# Altium PCB LiPoKiller_Panel.PcbDoc
Units mm, origin at the board's own origin, x right, y up, seen from the top; angles counter-clockwise.
Board outline 189 x 32 mm, 2 copper layers (Top Layer, Bottom Layer), stack 1.621 mm thick; 38 components, 11 nets, 102 pads, 0 vias.
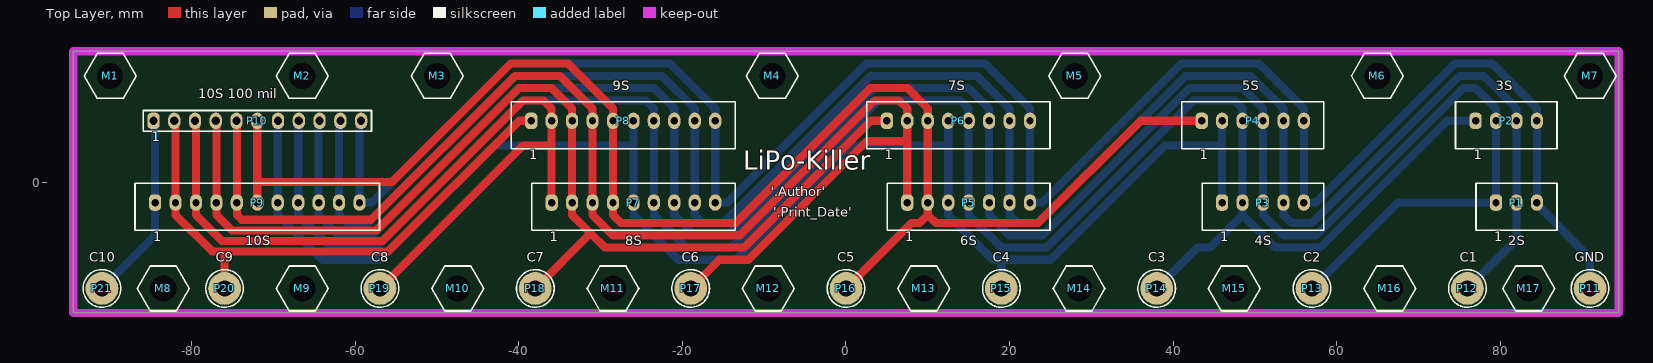
[diagram p0: Top Layer view]
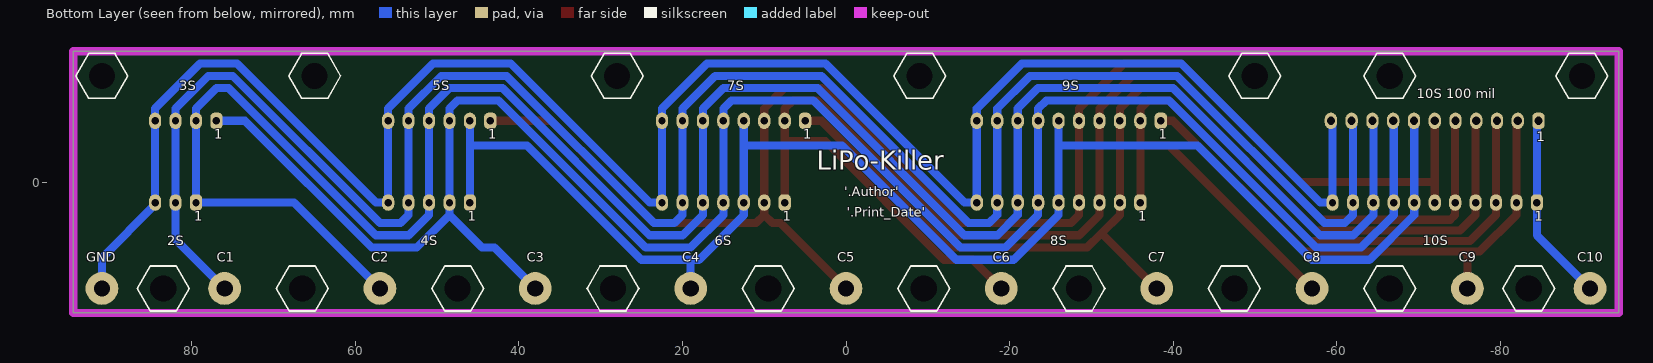
[diagram p1: Bottom Layer view, seen from below]
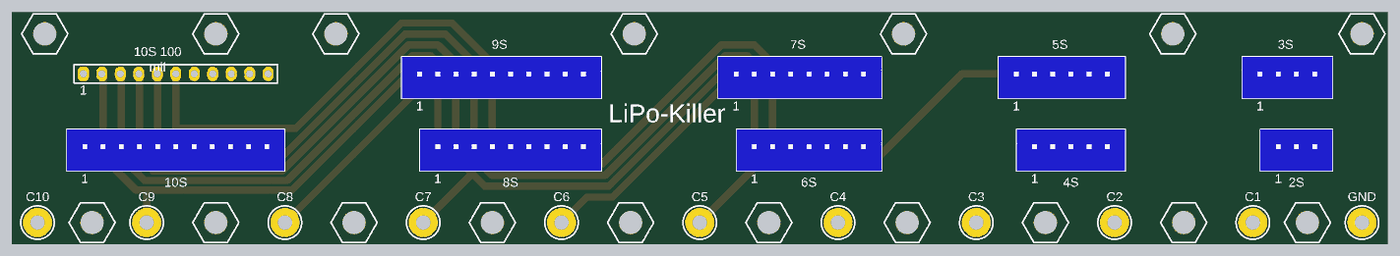
[diagram p2: 3D render of the assembled board from above, using the file's embedded part models]

## Layer stack, top to bottom
Top Solder: solder mask 0.0102, Solder Resist, Dk 3.5
Top Layer: signal copper 0.0356
Dielectric 1: dielectric 1.55, FR-4, Dk 4.8
Bottom Layer: signal copper 0.0356
Bottom Solder: solder mask 0.0102, Solder Resist, Dk 3.5

## Board outline
-94.5,-16 94.5,-16 94.5,16 -94.5,16

## Design rules (kind name [scope] priority, off if disabled: settings)
Clearance [All] p1: gap=0.2 ignorepadtopadclearanceinfootprint=FALSE except(0: Arc-Hole Track-Hole SMDPad-Hole THPad-Hole Via-Hole Fill-Hole Poly-Hole Region-Hole Text-Hole; 0.5: Track-THPad)
HoleSize [All] p1: absolutevalues=TRUE maxlimit=3.2 minlimit=0.3 maxpercent=80.000 minpercent=20.000
PolygonConnect [All] p1: connectstyle=Relief reliefconductorwidth=0.254 reliefentries=4 polygonreliefangle="90 Angle" airgapwidth=0.254
RoomDefinition LiPoKiller_Panel [InComponentClass('LiPoKiller_Panel')] p1: confinementstyle=ConfineIn formatcopy=TRUE lockcomponents=FALSE outline -94.5,-16.5 94.5,-16.5 94.5,16.5 -94.5,16.5
RoutingVias [All] p1: holewidth=0.711 width=1.27 viastyle="Through Hole" minholewidth=0.711 minwidth=1.27 maxholewidth=0.711 maxwidth=1.27
SilkToSolderMaskClearance [IsPad] p1: minsilkscreentomaskgap=0.1 clearancetoexposedcopper=TRUE
SolderMaskExpansion [All] p1: expansion=0.05 istentingtop=FALSE
Width [All] p1: maxlimit=5 minlimit=0.254 preferedwidth=1 minimp=50.000000 maximp=50.000000 favimp=50.000000
28 further rules are at their usual default settings.

## Components (designator, comment, footprint, x,y, rotation, side; value= is the part's Value field where it differs from the comment)
M1 "MOUNT M3" MOUNT_M3 -90,13 r180 top
M2 "MOUNT M3" MOUNT_M3 -66.5,13 r180 top
M3 "MOUNT M3" MOUNT_M3 -50,13 r180 top
M4 "MOUNT M3" MOUNT_M3 -9,13 r180 top
M5 "MOUNT M3" MOUNT_M3 28,13 r180 top
M6 "MOUNT M3" MOUNT_M3 65,13 r180 top
M7 "MOUNT M3" MOUNT_M3 91,13 r180 top
M8 "MOUNT M3" MOUNT_M3 -83.5,-13 r180 top
M9 "MOUNT M3" MOUNT_M3 -66.5,-13 r180 top
M10 "MOUNT M3" MOUNT_M3 -47.5,-13 r180 top
M11 "MOUNT M3" MOUNT_M3 -28.5,-13 r180 top
M12 "MOUNT M3" MOUNT_M3 -9.5,-13 r180 top
M13 "MOUNT M3" MOUNT_M3 9.5,-13 r180 top
M14 "MOUNT M3" MOUNT_M3 28.5,-13 r180 top
M15 "MOUNT M3" MOUNT_M3 47.5,-13 r180 top
M16 "MOUNT M3" MOUNT_M3 66.5,-13 r180 top
M17 "MOUNT M3" MOUNT_M3 83.5,-13 r180 top
P1 "JST_XH_B3B-XH-A" CON_JST_XH_B3B-XH-A 79.5,-2.5 r0 top
P2 "JST_XH_B4B-XH-A" CON_JST_XH_B4B-XH-A 77,7.5 r0 top
P3 "JST_XH_B5B-XH-A" CON_JST_XH_B5B-XH-A 46,-2.5 r0 top
P4 "JST_XH_B6B-XH-A" CON_JST_XH_B6B-XH-A 43.5,7.5 r0 top
P5 "JST_XH_B7B-XH-A" CON_JST_XH_B7B-XH-A 7.5,-2.5 r0 top
P6 "JST_XH_B8B-XH-A" CON_JST_XH_B8B-XH-A 5,7.5 r0 top
P7 "JST_XH_B9B-XH-A" CON_JST_XH_B9B-XH-A -36,-2.5 r0 top
P8 "JST_XH_B10B-XH-A" CON_JST_XH_B10B-XH-A -38.5,7.5 r0 top
P9 "JST_XH_B11B-XH-A" CON_JST_XH_B11B-XH-A -84.5,-2.5 r0 top
P10 "HEAD_2.54_11" CON_HEAD_2.54_11 -84.7,7.5 r0 top
P11 "Con_1" CON_1_2MM_4MM 91,-13 r180 top
P12 "Con_1" CON_1_2MM_4MM 76,-13 r180 top
P13 "Con_1" CON_1_2MM_4MM 57,-13 r180 top
P14 "Con_1" CON_1_2MM_4MM 38,-13 r180 top
P15 "Con_1" CON_1_2MM_4MM 19,-13 r180 top
P16 "Con_1" CON_1_2MM_4MM 0,-13 r180 top
P17 "Con_1" CON_1_2MM_4MM -19,-13 r180 top
P18 "Con_1" CON_1_2MM_4MM -38,-13 r180 top
P19 "Con_1" CON_1_2MM_4MM -57,-13 r180 top
P20 "Con_1" CON_1_2MM_4MM -76,-13 r180 top
P21 "Con_1" CON_1_2MM_4MM -91,-13 r180 top

## Footprints (in the part's own frame and the unit in brackets; to place one, negate y for a bottom-side part, rotate by r counter-clockwise, add the part's x,y. Pads: shape width x height; smd on the part's side, far side on the other; paste and mask are expansions set on the pad)
CON_1_2MM_4MM [mm] "1 Pin, 2mm Drill, 4mm Pad"
  round 4 hole 2: 1(0,0)
  silkscreen extent -2.3,-2.3 2.3,2.3
CON_HEAD_2.54_11 [mm] "Pin header 2.54mm grid, 11 pins"
  rrect70% 1.5x2 hole 1: 1(0,0)
  rrect100% 1.5x2 hole 1: 2(2.54,0) 3(5.08,0) 4(7.62,0) 5(10.16,0) 6(12.7,0) 7(15.24,0) 8(17.78,0) 9(20.32,0) 10(22.86,0) 11(25.4,0)
  silkscreen extent -1.27,-1.27 26.67,1.27, body extent -1.27,-1.27 26.67,1.27, height 10
CON_JST_XH_B3B-XH-A [mm] "JST XH 3 Pin"
  rrect70% 1.5x2 hole 0.9: 1(0,0)
  rrect100% 1.5x2 hole 0.9: 2(2.5,0) 3(5,0)
  silkscreen extent -2.45,-3.4 7.45,2.35, body extent -2.45,-3.4 7.45,2.35, height 7
CON_JST_XH_B4B-XH-A [mm] "JST XH 4 Pin"
  rrect70% 1.5x2 hole 0.9: 1(0,0)
  rrect100% 1.5x2 hole 0.9: 2(2.5,0) 3(5,0) 4(7.5,0)
  silkscreen extent -2.45,-3.4 9.95,2.35, body extent -2.45,-3.4 9.95,2.35, height 7
CON_JST_XH_B5B-XH-A [mm] "JST XH 5 Pin"
  rrect70% 1.5x2 hole 0.9: 1(0,0)
  rrect100% 1.5x2 hole 0.9: 2(2.5,0) 3(5,0) 4(7.5,0) 5(10,0)
  silkscreen extent -2.45,-3.4 12.45,2.35, body extent -2.45,-3.4 12.45,2.35, height 7
CON_JST_XH_B6B-XH-A [mm] "JST XH 6 Pin"
  rrect70% 1.5x2 hole 0.9: 1(0,0)
  rrect100% 1.5x2 hole 0.9: 2(2.5,0) 3(5,0) 4(7.5,0) 5(10,0) 6(12.5,0)
  silkscreen extent -2.45,-3.4 14.95,2.35, body extent -2.45,-3.4 14.95,2.35, height 7
CON_JST_XH_B7B-XH-A [mm] "JST XH 7 Pin"
  rrect70% 1.5x2 hole 0.9: 1(0,0)
  rrect100% 1.5x2 hole 0.9: 2(2.5,0) 3(5,0) 4(7.5,0) 5(10,0) 6(12.5,0) 7(15,0)
  silkscreen extent -2.45,-3.4 17.45,2.35, body extent -2.45,-3.4 17.45,2.35, height 7
CON_JST_XH_B8B-XH-A [mm] "JST XH 8 Pin"
  rrect70% 1.5x2 hole 0.9: 1(0,0)
  rrect100% 1.5x2 hole 0.9: 2(2.5,0) 3(5,0) 4(7.5,0) 5(10,0) 6(12.5,0) 7(15,0) 8(17.5,0)
  silkscreen extent -2.45,-3.4 19.95,2.35, body extent -2.45,-3.4 19.95,2.35, height 7
CON_JST_XH_B9B-XH-A [mm] "JST XH 9 Pin"
  rrect70% 1.5x2 hole 0.9: 1(0,0)
  rrect100% 1.5x2 hole 0.9: 2(2.5,0) 3(5,0) 4(7.5,0) 5(10,0) 6(12.5,0) 7(15,0) 8(17.5,0) 9(20,0)
  silkscreen extent -2.45,-3.4 22.45,2.35, body extent -2.45,-3.4 22.45,2.35, height 7.01
CON_JST_XH_B10B-XH-A [mm] "JST XH 10 Pin"
  rrect70% 1.5x2 hole 0.9: 1(0,0)
  rrect100% 1.5x2 hole 0.9: 2(2.5,0) 3(5,0) 4(7.5,0) 5(10,0) 6(12.5,0) 7(15,0) 8(17.5,0) 9(20,0) 10(22.5,0)
  silkscreen extent -2.45,-3.4 24.95,2.35, body extent -2.45,-3.4 24.95,2.35, height 7.01
CON_JST_XH_B11B-XH-A [mm] "JST XH 11 Pin"
  rrect70% 1.5x2 hole 0.9: 1(0,0)
  rrect100% 1.5x2 hole 0.9: 2(2.5,0) 3(5,0) 4(7.5,0) 5(10,0) 6(12.5,0) 7(15,0) 8(17.5,0) 9(20,0) 10(22.5,0) 11(25,0)
  silkscreen extent -2.45,-3.4 27.45,2.35, body extent -2.45,-3.4 27.45,2.35, height 7
MOUNT_M3 [mm] "Mounting hole M3"
  round 0 hole 3.2: 1(0,0)
  silkscreen extent -3.18,-2.75 3.18,2.75, body extent -3.18,-2.75 3.18,2.75, height 5

## Part data
M1 M2 M3 M4 M5 M6 M7 M8 M9 M10 M11 M12 M13 M14 M15 M16 M17: "Mounting hole M3"

## Nets (pads, with @x,y where several pads share a name; then routed paths per layer and width w, separated by ;. In a path a pad name is that pad's centre, name@x,y a point inside that pad or via, vN(x,y) a via of type N, cw(c..) or ccw(c..) an arc to the next point about the centre after c; other vN are vias at no path point)
C1: P1.2 P2.3 P3.4 P4.5 P5.6 P6.7 P7.8 P8.9 P9.10 P10.10 P12.1 | length 257.2
  Bottom Layer w1: P10.10 -62,7.34 P9.10 -62,-4 -61,-5 -58.5,-5 -40.5,13 -22.5,13 -18.5,9 P8.9 P7.8 -18.5,-4 -17.5,-5 -15,-5 3,13 16,13 20,9 P6.7 P5.6 20,-4 21,-5 23.5,-5 41.5,13 49.5,13 53.5,9 P4.5 P3.4 53.5,-4 54.5,-5 57,-5 75,13 78,13 82,9 P2.3 P1.2 82,-7 P12.1
C2: P1.1 P2.2 P3.3 P4.4 P5.5 P6.6 P7.7 P8.8 P9.9 P10.9 P13.1 | length 271
  Bottom Layer w1: P10.9 -64.5,7.38 P9.9 -64.5,-4 -62,-6.5 -58,-6.5 -40,11.5 -23.5,11.5 -21,9 P8.8 P7.7 -21,-4 -18.5,-6.5 -14.5,-6.5 3.5,11.5 15,11.5 17.5,9 P6.6 P5.5 17.5,-4 20,-6.5 24,-6.5 42,11.5 48.5,11.5 51,9 P4.4 P3.3 51,-4 53.5,-6.5 57.5,-6.5 75.5,11.5 77,11.5 79.5,9 P2.2 P1.1 67.5,-2.5 P13.1
C3: P2.1 P3.2 P4.3 P5.4 P6.5 P7.6 P8.7 P9.8 P10.8 P14.1 | length 245.4
  Bottom Layer w1: P10.8 -67,7.42 P9.8 -67,-4 -63,-8 -57.5,-8 -39.5,10 -24.5,10 -23.5,9 P8.7 P7.6 -23.5,-4 -19.5,-8 -14,-8 4,10 14,10 15,9 P6.5 P5.4 15,-4 19,-8 24.5,-8 42.5,10 47.5,10 48.5,9 P4.3 P3.2 48.5,-4 ; P14.1 43,-8 44.5,-8 48.5,-4 ; P2.1 73.5,7.5 58,-8 52.5,-8 48.5,-4
C4: P3.1 P4.2 P5.3 P6.4 P7.5 P8.6 P9.7 P10.7 P15.1 | length 187.7
  Bottom Layer w1: P10.7 -69.5,7.46 P9.7 -69.5,-4 -64,-9.5 -57,-9.5 -43,4.5 -26,4.5 ; P8.6 -26,4.5 ; P6.4 12.5,4.5 ; P15.1 19,-9.5 ; P3.1 46,4.5 ; P4.2 46,4.5 ; -26,4.5 P7.5 -26,-4 -20.5,-9.5 -13.5,-9.5 0.5,4.5 12.5,4.5 ; 12.5,4.5 P5.3 12.5,-4 18,-9.5 19,-9.5 ; 19,-9.5 25,-9.5 39,4.5 46,4.5
C5: P4.1 P5.2 P6.3 P7.4 P8.5 P9.6 P10.6 P16.1 | length 187.4
  Top Layer w1: P9.6 -72,0 ; P10.6 -72,0 ; P16.1 8,-5 9,-5 10,-4 ; P4.1 36,7.5 23.5,-5 11,-5 10,-4 ; -72,0 -55.5,0 -41,14.5 -34,14.5 -28.5,9 P8.5 P7.4 -28.5,-4 -27.5,-5 -13.5,-5 3,11.5 7.5,11.5 10,9 P6.3 P5.2 10,-4
C6: P5.1 P6.2 P7.3 P8.4 P9.5 P10.5 P17.1 | length 169.4
  Top Layer w1: P10.5 -74.5,7.46 P9.5 -74.5,-4 -73.9,-4.6 -58.1,-4.6 -40.5,13 -35,13 -31,9 P8.4 P7.3 -31,-4 -28.5,-6.5 -13,-6.5 3.5,10 6.483,10 7.5,8.983 P6.2 7.5,5 ; P17.1 -15.5,-9.5 -12,-9.5 2.5,5 7.5,5 ; P5.1 7.5,5
C7: P6.1 P7.2 P8.3 P9.4 P10.4 P18.1 | length 133.2
  Top Layer w1: P10.4 -77,7.42 P9.4 -77,-4 -75.1,-5.9 -57.4,-5.9 -40,11.5 -36,11.5 -33.5,9 P8.3 P7.2 -33.5,-4 -31.25,-6.25 ; P18.1 -31.25,-6.25 ; P6.1 3,7.5 -12.5,-8 -29.5,-8 -31.25,-6.25
C8: P7.1 P8.2 P9.3 P10.3 P19.1 | length 103.7
  Top Layer w1: P10.3 -79.5,7.38 P9.3 -79.5,-4 -76.3,-7.2 -56.7,-7.2 -39.5,10 -37,10 -36,9 P8.2 -36,4.5 ; P19.1 -39.5,4.5 -36,4.5 ; P7.1 -36,4.5
C9: P8.1 P9.2 P10.2 P20.1 | length 68.1
  Top Layer w1: P10.2 -82,7.34 P9.2 -82,-4 -77.5,-8.5 -56,-8.5 -40,7.5 P8.1 ; P20.1 -76,-8.5
C10: P9.1 P10.1 P21.1 | length 23.3
  Bottom Layer w1: P21.1 -84.5,-6.5 P9.1 -84.5,7.3 P10.1
GND: P1.3 P2.4 P3.5 P4.6 P5.7 P6.8 P7.9 P8.10 P9.11 P10.11 P11.1 | length 250.6
  Bottom Layer w1: P10.11 -59.5,7.3 P9.11 -58,-2.5 -41,14.5 -21.5,14.5 -16,9 P8.10 P7.9 -14.5,-2.5 2.5,14.5 17,14.5 22.5,9 P6.8 P5.7 24,-2.5 41,14.5 50.5,14.5 56,9 P4.6 P3.5 57.5,-2.5 74.5,14.5 79,14.5 84.5,9 P2.4 P1.3 84.5,-2.75 91,-9.25 P11.1
pads on no net: M1.1 M2.1 M3.1 M4.1 M5.1 M6.1 M7.1 M8.1 M9.1 M10.1 M11.1 M12.1 M13.1 M14.1 M15.1 M16.1 M17.1

## Keep-outs
Keep-Out Layer:
  the board outline again, w1

## Silkscreen, mask and mechanical layers (free items; w line width, h text height)
Top Overlay:
  text "9S" at -28.523,10.837 h2
  text "7S" at 12.477,10.837 h2
  text "5S" at 48.477,10.837 h2
  text "3S" at 79.477,10.837 h2
  text "10S 100 mil" at -79.224,9.837 h2
  text "LiPo-Killer" at -12.555,0.698 h4
  text "'.Author'" at -9.188,-2.151 h2
  text "'.Print_Date'" at -8.905,-4.655 h2
  text "10S" at -73.449,-8.163 h2
  text "8S" at -27.023,-8.163 h2
  text "6S" at 13.977,-8.163 h2
  text "4S" at 49.962,-8.163 h2
  text "2S" at 80.977,-8.163 h2
  text "C10" at -92.555,-10.163 h2
  text "C9" at -77.06,-10.163 h2
  text "C8" at -58.06,-10.163 h2
  text "C7" at -39.059,-10.163 h2
  text "C6" at -20.059,-10.163 h2
  text "C5" at -1.064,-10.163 h2
  text "C4" at 17.944,-10.163 h2
  text "C3" at 36.941,-10.163 h2
  text "C2" at 55.947,-10.163 h2
  text "C1" at 75.065,-10.163 h2
  text "GND" at 89.106,-10.163 h2
Bottom Overlay:
  text "9S" at -26.477,10.837 h2
  text "7S" at 14.523,10.837 h2
  text "5S" at 50.523,10.837 h2
  text "3S" at 81.523,10.837 h2
  text "10S 100 mil" at -69.776,9.837 h2
  text "LiPo-Killer" at 3.555,0.698 h4
  text "'.Author'" at 0.188,-2.151 h2
  text "'.Print_Date'" at -0.095,-4.655 h2
  text "10S" at -70.551,-8.163 h2
  text "8S" at -24.977,-8.163 h2
  text "6S" at 16.023,-8.163 h2
  text "4S" at 52.038,-8.163 h2
  text "2S" at 83.023,-8.163 h2
  text "C10" at -89.445,-10.163 h2
  text "C9" at -74.94,-10.163 h2
  text "C8" at -55.94,-10.163 h2
  text "C7" at -36.941,-10.163 h2
  text "C6" at -17.941,-10.163 h2
  text "C5" at 1.064,-10.163 h2
  text "C4" at 20.056,-10.163 h2
  text "C3" at 39.059,-10.163 h2
  text "C2" at 58.053,-10.163 h2
  text "C1" at 76.935,-10.163 h2
  text "GND" at 92.894,-10.163 h2
Mechanical 1:
  the board outline again, w1

## Text inside footprints (layer, text, board x,y; h text height)
P1: Top Overlay "1" at 79.264,-7.651 h2; Bottom Overlay "1" at 79.736,-5.144 h2
P2: Top Overlay "1" at 76.764,2.349 h2; Bottom Overlay "1" at 77.236,4.856 h2
P3: Top Overlay "1" at 45.764,-7.651 h2; Bottom Overlay "1" at 46.236,-5.144 h2
P4: Top Overlay "1" at 43.264,2.349 h2; Bottom Overlay "1" at 43.736,4.856 h2
P5: Top Overlay "1" at 7.264,-7.651 h2; Bottom Overlay "1" at 7.736,-5.144 h2
P6: Top Overlay "1" at 4.764,2.349 h2; Bottom Overlay "1" at 5.236,4.856 h2
P7: Top Overlay "1" at -36.236,-7.651 h2; Bottom Overlay "1" at -35.764,-5.144 h2
P8: Top Overlay "1" at -38.736,2.349 h2; Bottom Overlay "1" at -38.264,4.856 h2
P9: Top Overlay "1" at -84.736,-7.651 h2; Bottom Overlay "1" at -84.264,-5.144 h2
P10: Top Overlay "1" at -84.936,4.549 h2; Bottom Overlay "1" at -84.464,4.556 h2